# Altium PCB TSE_power_control_board.PcbDoc
Units mm, origin at the board's own origin, x right, y up, seen from the top; angles counter-clockwise.
Board outline 87.5 x 79 mm, 2 copper layers (Top Layer, Bottom Layer); 60 components, 32 nets, 169 pads, 50 vias.
Unrouted connection lines stored in the file: 1.
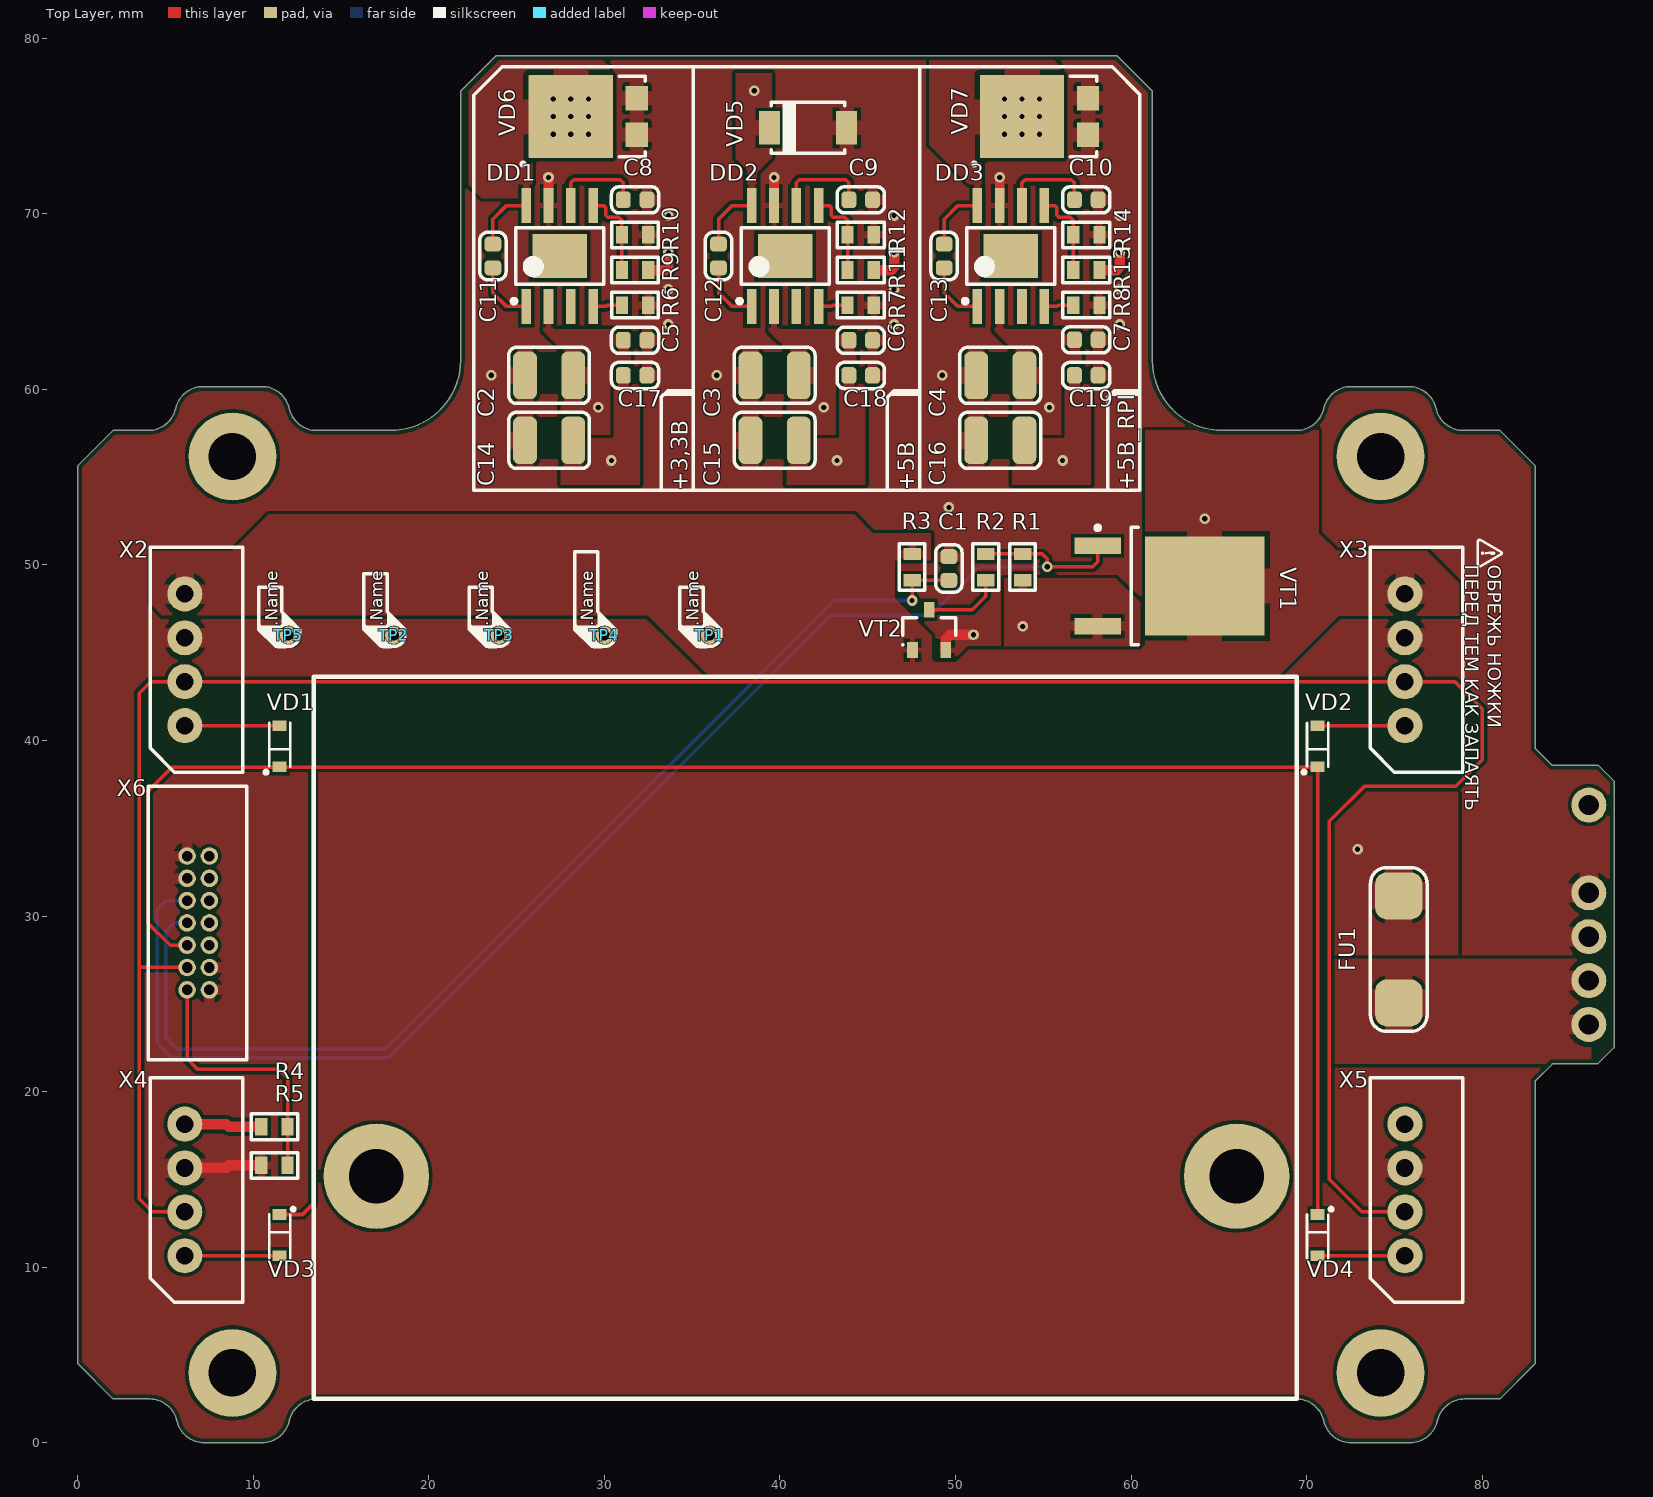
[diagram p0: Top Layer view]
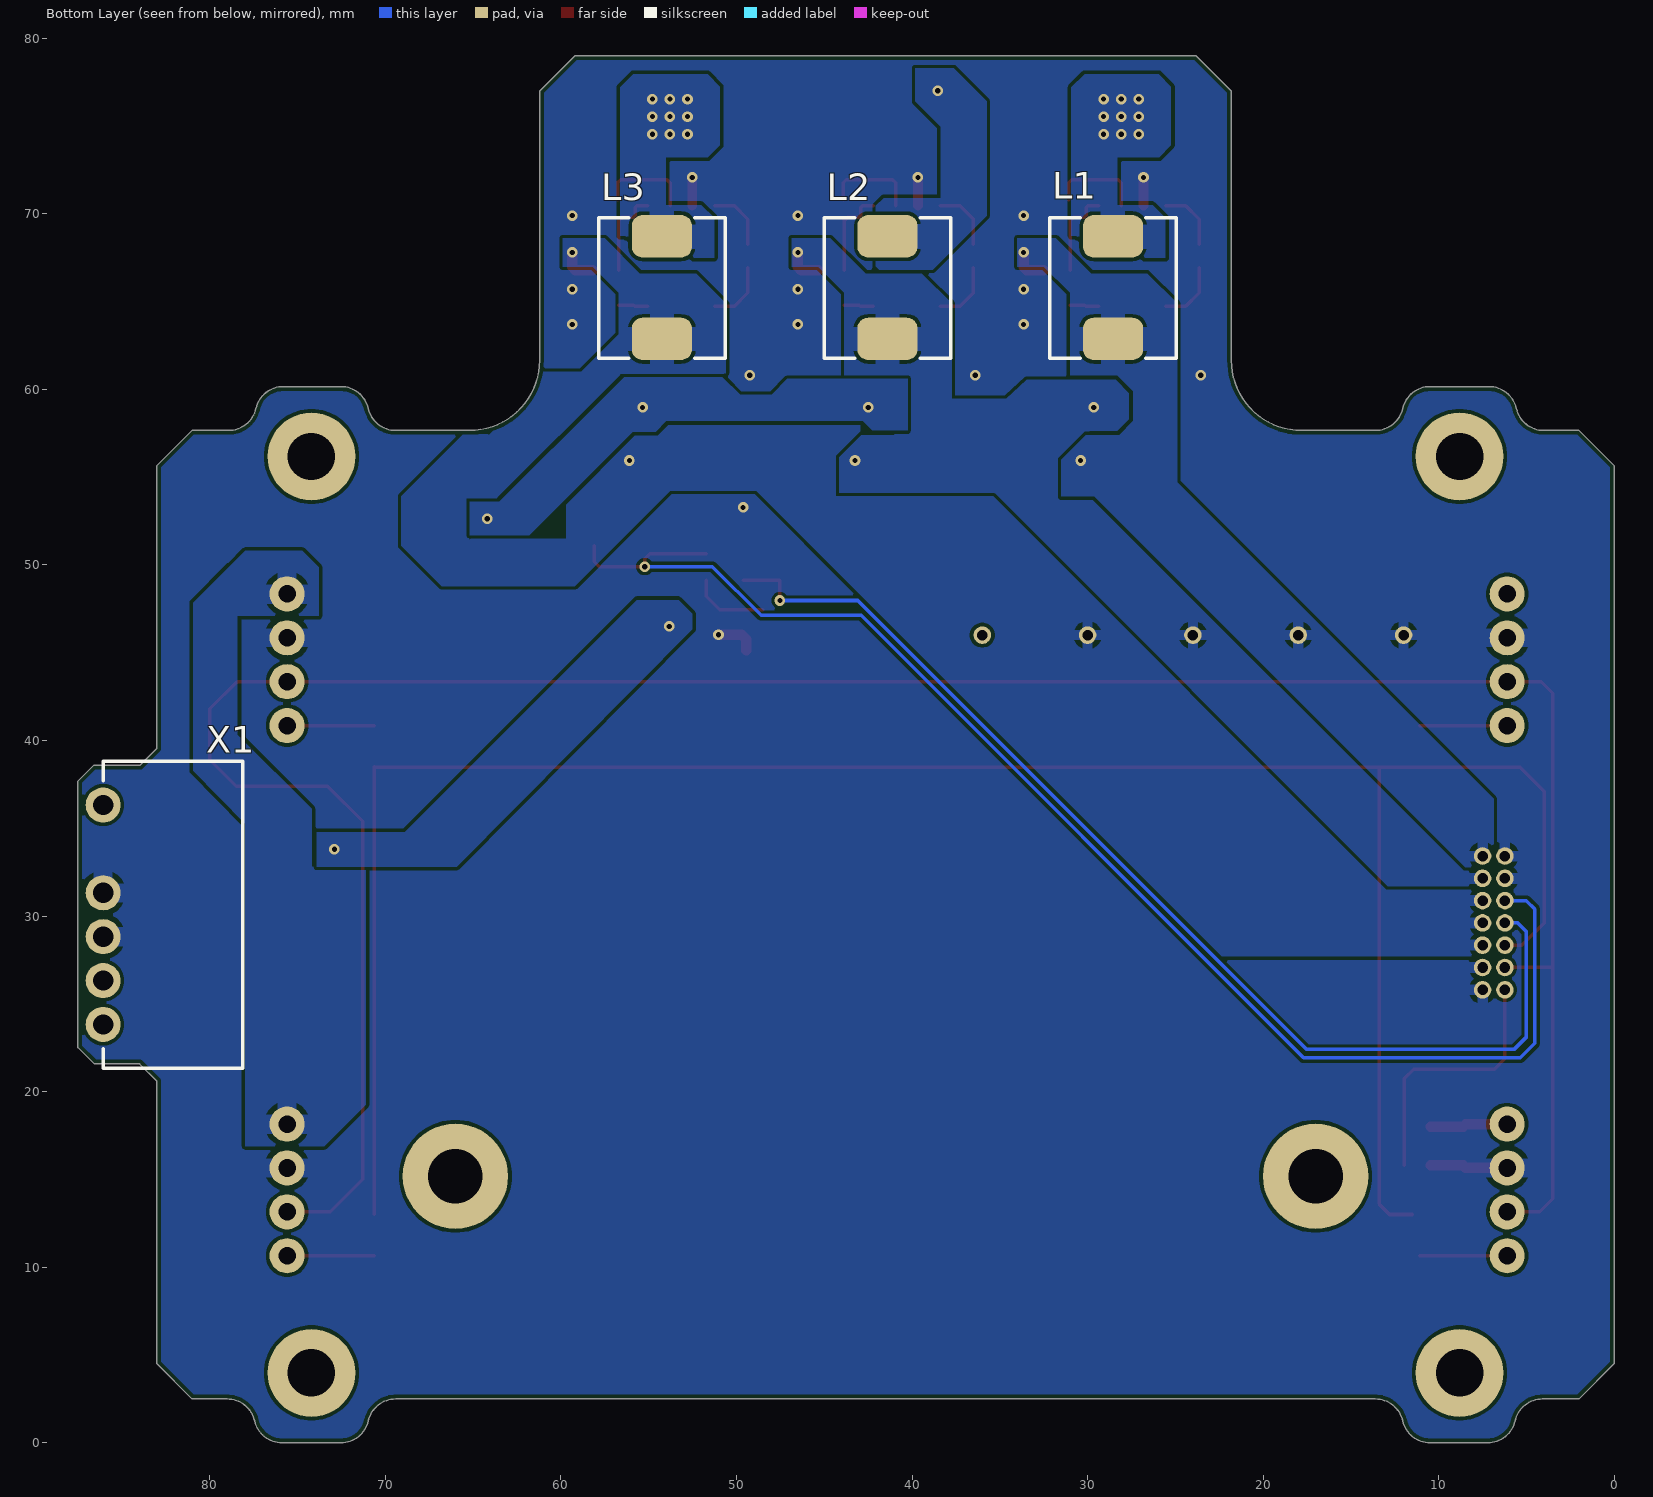
[diagram p1: Bottom Layer view, seen from below]
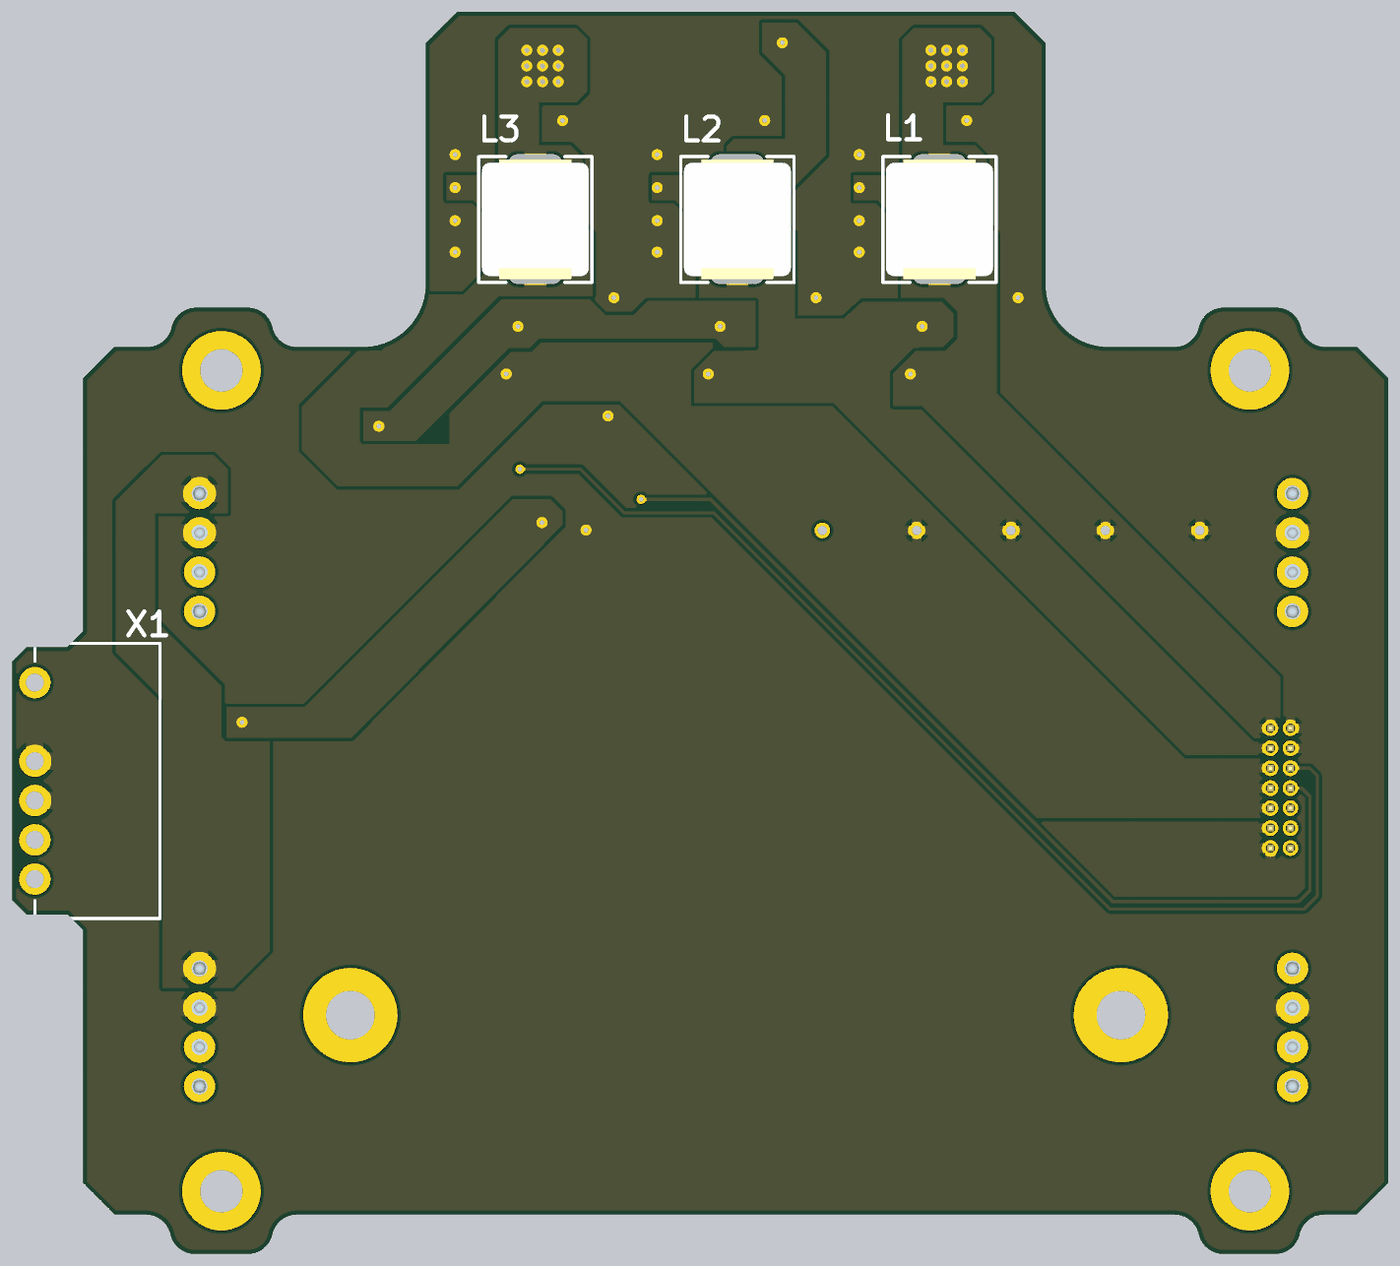
[diagram p2: 3D render of the assembled board from below, using the file's embedded part models]

## Layer stack, top to bottom
Top Solder: solder mask 0.0102, Solder Resist, Dk 3.5
Top Layer: signal copper 0.0356
Dielectric 1: dielectric 0.32, FR-4, Dk 4.8
Bottom Layer: signal copper 0.0356
Bottom Solder: solder mask 0.0102, Solder Resist, Dk 3.5

## Board outline
2.012,2.494 4.09,2.494 cw(c4.09,0.894) 5.651,1.244 ccw(c7.212,1.594) 7.212,-0.006 10.49,-0.006 ccw(c10.49,1.594) 12.051,1.244 cw(c13.612,0.894) 13.612,2.494 69.412,2.494 cw(c69.412,0.894) 70.974,1.244 ccw(c72.535,1.594) 72.535,-0.006 75.89,-0.006 ccw(c75.89,1.594) 77.451,1.244 cw(c79.012,0.894) 79.012,2.494 81.012,2.494 83.012,4.494 83.012,20.587 84.003,21.578 86.578,21.578 87.512,22.512 87.512,37.688 86.622,38.578 83.997,38.578 83.012,39.563 83.012,55.662 81.012,57.662 78.935,57.662 cw(c78.935,59.262) 77.374,58.912 ccw(c75.812,58.562) 75.812,60.162 72.535,60.162 ccw(c72.535,58.562) 70.974,58.912 cw(c69.412,59.262) 69.412,57.662 65.212,57.662 cw(c65.212,61.662) 61.212,61.662 61.212,76.994 59.212,78.994 23.812,78.994 21.812,76.994 21.812,61.662 cw(c17.812,61.662) 17.812,57.662 13.612,57.662 cw(c13.612,59.262) 12.051,58.912 ccw(c10.49,58.562) 10.49,60.162 7.135,60.162 ccw(c7.135,58.562) 5.574,58.912 cw(c4.012,59.262) 4.012,57.662 2.012,57.662 0.012,55.662 0.012,4.494

## Design rules (kind name [scope] priority, off if disabled: settings)
AcuteAngle min_acute_angle [OnCopper] p1: minimum=3.50000000000000E+0001 checktracksonly=FALSE // Минимальный угол между примитивами топологии
BoardOutlineClearance board_outline_clearance_std [NOT (OnLayer('Bottom Overlay') OR OnLayer('Top Overlay'))] p1: gap=0.25 ignorepadtopadclearanceinfootprint=FALSE except(0: Arc-SplitContinuation Track-SplitContinuation SMDPad-SplitContinuation THPad-SplitContinuation Via-SplitContinuation Fill-SplitContinuation Poly-SplitContinuation Region-SplitContinuation Text-SplitContinuation) // Отступ элементов топологии от края фрезеруемой печатной платы
Clearance clearance_outer_35um_std [OnTopLayer OR OnBottomLayer] p1: gap=0.2 ignorepadtopadclearanceinfootprint=TRUE except(0.25: Arc-Hole Track-Hole SMDPad-Hole THPad-Hole Via-Hole Fill-Hole Poly-Hole Region-Hole Text-Hole) // Зазоры на внешних слоях
Clearance clearance_inner_35um_std [NOT (OnTopLayer Or OnBottomLayer)] p2: gap=0.2 ignorepadtopadclearanceinfootprint=FALSE except(0.25: Arc-Hole Track-Hole SMDPad-Hole THPad-Hole Via-Hole Fill-Hole Poly-Hole Region-Hole Text-Hole) // Зазоры на внутренних слоях
ComponentClearance [All] p1: gap=0 collisioncheckmode=3 verticalgap=0 showdistances=FALSE
DiffPairsRouting diff_pairs_routing [All] p1: maxlimit=0.127 minlimit=0.127 mostfreqgap=0.127 toplayer_minwidth=0.143 toplayer_maxwidth=0.143 toplayer_prefwidth=0.143 bottomlayer_minwidth=0.143 bottomlayer_maxwidth=0.143 bottomlayer_prefwidth=0.143 impedanceprofiledriven=TRUE impedanceprofileid={FD46899E-B5A2-4EF5-A302-5D2DB6A51F35} maxuncoupledlength=12.7 // Правила трассировки дифференциальных пар
HoleSize min_hole_size_std [IsPad] p1: absolutevalues=TRUE maxlimit=5.9 minlimit=0.6 maxpercent=80.000 minpercent=20.000 // Диаметр межслойного переходного отверстия
HoleSize min_hole_size_via_std [IsVia] p2: absolutevalues=TRUE maxlimit=5.9 minlimit=0.3 maxpercent=80.000 minpercent=20.000 // Минимальный диаметр монтажного отверстия
HoleToHoleClearance hole_to_hole_clearance_std [All] p1: gap=0.2 allowstackedmicrovias=FALSE // Минимальное расстояние между краями двух отверстий
MinimumAnnularRing min_via_ar_std [All] p1: minimumring=0.15 // Поясок площадки переходного отверстия (Annular ring VIA)
MinimumAnnularRing min_pad_ar_std [All] p2: minimumring=0.2 // Поясок монтажной контактной площадки (Annular ring PAD)
MinimumSolderMaskSliver min_solder_mask_bridge_std [All] p1: minsoldermaskwidth=0.15 // Мнимальная ширина масочного мостика
PlaneClearance plane_clearance_35um_std [All] p1: clearance=0.2 // Отступ полигона (для слоя plane) от элементов топологии
PlaneConnect [All] p1: planeconnectstyle=Relief reliefexpansion=0.5 reliefentries=4 reliefconductorwidth=0.2 reliefairgap=0.2
PolygonConnect poly_connect_to_pad<=0.3 [(AsMM(PadXSize_AllLayers)<=0.301) or (AsMM(PadYSize_AllLayers)<=0.301)] p1: thpad.connectstyle=Relief thpad.reliefconductorwidth=0.2 thpad.reliefentries=4 thpad.polygonreliefangle="90 Angle" thpad.airgapwidth=0.2 smdpad.connectstyle=Relief smdpad.reliefconductorwidth=0.2 smdpad.reliefentries=4 smdpad.polygonreliefangle="90 Angle" smdpad.airgapwidth=0.2 via.connectstyle=Direct via.reliefconductorwidth=0.254 via.reliefentries=4 via.polygonreliefangle="90 Angle" via.airgapwidth=0.254 // Правила подключения полигонов для падов от 0,3мм и меньше
PolygonConnect poly_connect_to_pad<=0.4 [(AsMM(PadXSize_AllLayers)<=0.401) or (AsMM(PadYSize_AllLayers)<=0.401)] p2: thpad.connectstyle=Relief thpad.reliefconductorwidth=0.26 thpad.reliefentries=4 thpad.polygonreliefangle="90 Angle" thpad.airgapwidth=0.2 smdpad.connectstyle=Relief smdpad.reliefconductorwidth=0.26 smdpad.reliefentries=4 smdpad.polygonreliefangle="90 Angle" smdpad.airgapwidth=0.2 via.connectstyle=Direct via.reliefconductorwidth=0.254 via.reliefentries=4 via.polygonreliefangle="90 Angle" via.airgapwidth=0.254 // Правила подключения полигонов для падов от 0,4 и меньше
PolygonConnect poly_connect_to_pad<=0.6 [(AsMM(PadXSize_AllLayers)<=0.601) or (AsMM(PadYSize_AllLayers)<=0.601)] p3: thpad.connectstyle=Relief thpad.reliefconductorwidth=0.33 thpad.reliefentries=4 thpad.polygonreliefangle="90 Angle" thpad.airgapwidth=0.2 smdpad.connectstyle=Relief smdpad.reliefconductorwidth=0.33 smdpad.reliefentries=4 smdpad.polygonreliefangle="90 Angle" smdpad.airgapwidth=0.2 via.connectstyle=Direct via.reliefconductorwidth=0.254 via.reliefentries=4 via.polygonreliefangle="90 Angle" via.airgapwidth=0.254 // Правила подключения полигонов для падов от 0,6мм и меньше
PolygonConnect poly_connect_to_pad<=0.7 [(AsMM(PadXSize_AllLayers)<=0.701) or (AsMM(PadYSize_AllLayers)<=0.701)] p4: thpad.connectstyle=Relief thpad.reliefconductorwidth=0.46 thpad.reliefentries=4 thpad.polygonreliefangle="90 Angle" thpad.airgapwidth=0.2 smdpad.connectstyle=Relief smdpad.reliefconductorwidth=0.46 smdpad.reliefentries=4 smdpad.polygonreliefangle="90 Angle" smdpad.airgapwidth=0.2 via.connectstyle=Direct via.reliefconductorwidth=0.254 via.reliefentries=4 via.polygonreliefangle="90 Angle" via.airgapwidth=0.254 // Правила подключения полигонов для падов от 0,7мм и меньше
PolygonConnect poly_connect_to_pad<=0.8 [(AsMM(PadXSize_AllLayers)<=0.8)or(AsMM(PadYSize_AllLayers)<=0.8)] p5: thpad.connectstyle=Relief thpad.reliefconductorwidth=0.53 thpad.reliefentries=4 thpad.polygonreliefangle="90 Angle" thpad.airgapwidth=0.3 smdpad.connectstyle=Relief smdpad.reliefconductorwidth=0.53 smdpad.reliefentries=4 smdpad.polygonreliefangle="90 Angle" smdpad.airgapwidth=0.2 via.connectstyle=Direct via.reliefconductorwidth=0.254 via.reliefentries=4 via.polygonreliefangle="90 Angle" via.airgapwidth=0.254 // Правила подключения полигонов для падов от 0,8мм и меньше
PolygonConnect poly_connect_to_pad<=1 [(AsMM(PadXSize_AllLayers)<=1.01)or(AsMM(PadYSize_AllLayers)<=1.01)] p6: thpad.connectstyle=Relief thpad.reliefconductorwidth=0.6 thpad.reliefentries=4 thpad.polygonreliefangle="90 Angle" thpad.airgapwidth=0.3 smdpad.connectstyle=Relief smdpad.reliefconductorwidth=0.6 smdpad.reliefentries=4 smdpad.polygonreliefangle="90 Angle" smdpad.airgapwidth=0.2 via.connectstyle=Direct via.reliefconductorwidth=0.254 via.reliefentries=4 via.polygonreliefangle="90 Angle" via.airgapwidth=0.254 // Правила подключения полигонов для падов от 1мм и меньше
PolygonConnect poly_connect_to_pad<=1.3 [(AsMM(PadXSize_AllLayers)<=1.31)or(AsMM(PadYSize_AllLayers)<=1.31)] p7: thpad.connectstyle=Relief thpad.reliefconductorwidth=0.66 thpad.reliefentries=4 thpad.polygonreliefangle="90 Angle" thpad.airgapwidth=0.3 smdpad.connectstyle=Relief smdpad.reliefconductorwidth=0.86 smdpad.reliefentries=4 smdpad.polygonreliefangle="90 Angle" smdpad.airgapwidth=0.2 via.connectstyle=Direct via.reliefconductorwidth=0.254 via.reliefentries=4 via.polygonreliefangle="90 Angle" via.airgapwidth=0.254 // Правила подключения полигонов для падов от 1,3мм и меньше
PolygonConnect poly_connect_to_pad<=1.6 [(AsMM(PadXSize_AllLayers)<=1.61)or(AsMM(PadYSize_AllLayers)<=1.61)] p8: thpad.connectstyle=Relief thpad.reliefconductorwidth=0.8 thpad.reliefentries=4 thpad.polygonreliefangle="90 Angle" thpad.airgapwidth=0.3 smdpad.connectstyle=Relief smdpad.reliefconductorwidth=1 smdpad.reliefentries=4 smdpad.polygonreliefangle="90 Angle" smdpad.airgapwidth=0.2 via.connectstyle=Direct via.reliefconductorwidth=0.254 via.reliefentries=4 via.polygonreliefangle="90 Angle" via.airgapwidth=0.254 // Правила подключения полигонов для падов от 1,6мм и меньше
PolygonConnect poly_connect_to_pad<=1.8 [(AsMM(PadXSize_AllLayers)<=1.8)or(AsMM(PadYSize_AllLayers)<=1.8)] p9: thpad.connectstyle=Relief thpad.reliefconductorwidth=1 thpad.reliefentries=4 thpad.polygonreliefangle="90 Angle" thpad.airgapwidth=0.3 smdpad.connectstyle=Relief smdpad.reliefconductorwidth=1.2 smdpad.reliefentries=4 smdpad.polygonreliefangle="90 Angle" smdpad.airgapwidth=0.2 via.connectstyle=Direct via.reliefconductorwidth=0.254 via.reliefentries=4 via.polygonreliefangle="90 Angle" via.airgapwidth=0.254 // Правила подключения полигонов для падов от 1,8мм и меньше
PolygonConnect poly_connect_to_pad<=2 [(AsMM(PadXSize_AllLayers)<=2.01)or(AsMM(PadYSize_AllLayers)<=2.01)] p10: thpad.connectstyle=Relief thpad.reliefconductorwidth=1.1 thpad.reliefentries=4 thpad.polygonreliefangle="90 Angle" thpad.airgapwidth=0.3 smdpad.connectstyle=Relief smdpad.reliefconductorwidth=1.4 smdpad.reliefentries=4 smdpad.polygonreliefangle="90 Angle" smdpad.airgapwidth=0.2 via.connectstyle=Direct via.reliefconductorwidth=0.254 via.reliefentries=4 via.polygonreliefangle="90 Angle" via.airgapwidth=0.254 // Правила подключения полигонов для падов от 2мм и меньше
PolygonConnect poly_connect_to_pad<=2.3 [(AsMM(PadXSize_AllLayers)<=2.31)or(AsMM(PadYSize_AllLayers)<=2.31)] p11: thpad.connectstyle=Relief thpad.reliefconductorwidth=1.2 thpad.reliefentries=4 thpad.polygonreliefangle="90 Angle" thpad.airgapwidth=0.3 smdpad.connectstyle=Relief smdpad.reliefconductorwidth=1.4 smdpad.reliefentries=4 smdpad.polygonreliefangle="90 Angle" smdpad.airgapwidth=0.2 via.connectstyle=Direct via.reliefconductorwidth=0.254 via.reliefentries=4 via.polygonreliefangle="90 Angle" via.airgapwidth=0.254 // Правила подключения полигонов для падов от 2,3мм и меньше
PolygonConnect poly_connect_to_pad<=2.5 [(AsMM(PadXSize_AllLayers)<=2.51)or(AsMM(PadYSize_AllLayers)<=2.51)] p12: thpad.connectstyle=Relief thpad.reliefconductorwidth=1.2 thpad.reliefentries=4 thpad.polygonreliefangle="90 Angle" thpad.airgapwidth=0.3 smdpad.connectstyle=Relief smdpad.reliefconductorwidth=1.4 smdpad.reliefentries=4 smdpad.polygonreliefangle="90 Angle" smdpad.airgapwidth=0.2 via.connectstyle=Direct via.reliefconductorwidth=0.254 via.reliefentries=4 via.polygonreliefangle="90 Angle" via.airgapwidth=0.254 // Правила подключения полигонов для падов от 2,5мм и меньше
PolygonConnect poly_connect_to_pad<=2.7 [(AsMM(PadXSize_AllLayers)<=2.71)or(AsMM(PadYSize_AllLayers)<=2.71)] p13: thpad.connectstyle=Relief thpad.reliefconductorwidth=1.4 thpad.reliefentries=4 thpad.polygonreliefangle="90 Angle" thpad.airgapwidth=0.3 smdpad.connectstyle=Relief smdpad.reliefconductorwidth=1.6 smdpad.reliefentries=4 smdpad.polygonreliefangle="90 Angle" smdpad.airgapwidth=0.2 via.connectstyle=Direct via.reliefconductorwidth=0.254 via.reliefentries=4 via.polygonreliefangle="90 Angle" via.airgapwidth=0.254 // Правила подключения полигонов для падов от 2,7мм и меньше
PolygonConnect poly_connect_to_pad<=3 [(AsMM(PadXSize_AllLayers)<=3.01)or(AsMM(PadYSize_AllLayers)<=3.01)] p14: thpad.connectstyle=Relief thpad.reliefconductorwidth=1.6 thpad.reliefentries=4 thpad.polygonreliefangle="90 Angle" thpad.airgapwidth=0.3 smdpad.connectstyle=Relief smdpad.reliefconductorwidth=1.8 smdpad.reliefentries=4 smdpad.polygonreliefangle="90 Angle" smdpad.airgapwidth=0.2 via.connectstyle=Direct via.reliefconductorwidth=0.254 via.reliefentries=4 via.polygonreliefangle="90 Angle" via.airgapwidth=0.254 // Правила подключения полигонов для падов от 3мм и меньше
PolygonConnect poly_connect_to_pad<=7 [(AsMM(PadXSize_AllLayers)<7.01)or(AsMM(PadYSize_AllLayers)<=7.01)] p15: thpad.connectstyle=Relief thpad.reliefconductorwidth=2 thpad.reliefentries=4 thpad.polygonreliefangle="90 Angle" thpad.airgapwidth=0.4 smdpad.connectstyle=Relief smdpad.reliefconductorwidth=2 smdpad.reliefentries=4 smdpad.polygonreliefangle="90 Angle" smdpad.airgapwidth=0.3 via.connectstyle=Direct via.reliefconductorwidth=0.254 via.reliefentries=4 via.polygonreliefangle="90 Angle" via.airgapwidth=0.254 // Правила подключения полигонов для падов от 7мм и меньше
PolygonConnect poly_connect_to_pad [All] p16: thpad.connectstyle=Relief thpad.reliefconductorwidth=0.25 thpad.reliefentries=4 thpad.polygonreliefangle="90 Angle" thpad.airgapwidth=0.2 smdpad.connectstyle=Relief smdpad.reliefconductorwidth=0.25 smdpad.reliefentries=4 smdpad.polygonreliefangle="90 Angle" smdpad.airgapwidth=0.2 via.connectstyle=Direct via.reliefconductorwidth=0.25 via.reliefentries=4 via.polygonreliefangle="90 Angle" via.airgapwidth=0.2 // Правила подключения полигонов общие
RoutingCorners [All] p1 off: cornerstyle=45-Degree minsetback=2.5 maxsetback=2.5
RoutingVias [All] p1: holewidth=0.3 width=0.6 viastyle="Through Hole" minholewidth=0.3 minwidth=0.6 maxholewidth=5.9 maxwidth=6.4
SilkToSilkClearance silk_to_silk_clearance_std [All] p1 off: silktosilkclearance=0.15 // Отступ текста шелкографии от других примитивов шелкографии
SilkToSolderMaskClearance silk_to_solder_mask_clearance_std [IsPad] p1 off: minsilkscreentomaskgap=0.15 clearancetoexposedcopper=FALSE // Минимальное расстояние между элементами шелкографии и вскрытой медью
SolderMaskExpansion solder_mask_expansion_std [All] p1: expansion=0.05 istentingtop=FALSE // Припуск паяльной масски
UnRoutedNet [All] p1: checkbadconnections=TRUE
Width width_35um_std [All] p1: maxlimit=10 minlimit=0.2 preferedwidth=0.2 checkconnectedcopper=TRUE // Ширина проводников (общая)
19 further rules are at their usual default settings.

## Classes and differential pairs
component class TSE_power_control_board_main: C1 FU1 R1 R2 R3 R4 R5 TP4 VD1 VD2 VD3 VD4 VT1 VT2 X1 X2 X3 X4 X5 X6
component class TSE_power_control_board_converters: C2 C3 C4 C5 C6 C7 C8 C9 C10 C11 C12 C13 C14 C15 C16 C17 C18 C19 DD1 DD2 DD3 L1 L2 L3 R6 R7 R8 R9 R10 R11 R12 R13 R14 TP4 TP5 VD5 VD6 VD7

## Components (designator, comment, footprint, x,y, rotation, side; value= is the part's Value field where it differs from the comment)
C1 "0,1мк" C0603 49.625,49.8 r270 top
C2 "10мк" C1210 26.85,60.8 r0 top
C3 "10мк" C1210 39.7,60.8 r0 top
C4 "10мк" C1210 52.55,60.8 r0 top
C5 "0,1мк" C0603 31.75,62.8 r180 top
C6 "0,1мк" C0603 44.6,62.8 r180 top
C7 "0,1мк" C0603 57.45,62.825 r180 top
C8 "0,022мк" C0603 31.75,70.8 r180 top
C9 "0,022мк" C0603 44.6,70.8 r180 top
C10 "0,022мк" C0603 57.45,70.8 r180 top
C11 "0,1мк" C0603 23.65,67.6 r270 top
C12 "0,1мк" C0603 36.5,67.6 r270 top
C13 "0,1мк" C0603 49.35,67.6 r270 top
C14 "100мк" C1210 26.85,57.1 r0 top
C15 "100мк" C1210 39.7,57.1 r0 top
C16 "100мк" C1210 52.55,57.1 r0 top
C17 "0,1мк" C0603 31.75,60.8 r180 top
C18 "0,1мк" C0603 44.6,60.8 r180 top
C19 "0,1мк" C0603 57.45,60.8 r180 top
DD1 "LMR14050" SO-8PP 27.45,67.6 r90 top
DD2 "LMR14050" SO-8PP 40.3,67.6 r90 top
DD3 "LMR14050" SO-8PP 53.15,67.6 r90 top
FU1 "15А" FU2410 75.25,28.098 r90 top
L1 "3,3мк" 2525 28.55,65.8 r270 bottom
L2 "4,7мк" 2525 41.4,65.8 r270 bottom
L3 "2,2мк" 2525 54.25,65.8 r270 bottom
R1 "47к" R0603 53.825,49.875 r90 top
R2 "10к" R0603 51.725,49.875 r90 top
R3 "510к" R0603 47.525,49.875 r90 top
R4 "10к" R0603 11.2,18 r180 top
R5 "2,4к" R0603 11.2,15.8 r0 top
R6 "23,7к" R0603 31.75,64.8 r180 top
R7 "23,7к" R0603 44.6,64.8 r180 top
R8 "23,7к" R0603 57.45,64.8 r180 top
R9 "100к" R0603 31.75,66.8 r0 top
R10 "29,4к" R0603 31.75,68.8 r180 top
R11 "100к" R0603 44.6,66.8 r0 top
R12 "17.8к" R0603 44.6,68.8 r180 top
R13 "100к" R0603 57.45,66.8 r0 top
R14 "17.8к" R0603 57.45,68.8 r180 top
TP1 "+4S" TP_0,6X1 36,46 r90 top
TP2 "+3,3В" TP_0,6X1 18,46 r90 top
TP3 "+5В" TP_0,6X1 24,46 r90 top
TP4 "+5В_RPI" TP_0,6X1 30,46 r90 top
TP5 "GND" TP_0,6X1 12,46 r90 top
VD1 "1N5817WS" SOD323 11.5,40.1 r90 top
VD2 "1N5817WS" SOD323 70.625,40.1 r90 top
VD3 "1N5817WS" SOD323 11.5,11.4 r270 top
VD4 "1N5817WS" SOD323 70.625,11.4 r270 top
VD5 "PMEG3050BEP" SOD128 41.6,74.9 r0 top
VD6 "SS10PH10-M3" TO-277A 29.09,75.54 r180 top
VD7 "SS10PH10-M3" TO-277A 54.79,75.54 r180 top
VT1 "IRFR5305TRPBF" D-PAK 62.2,48.8 r0 top
VT2 "IRLML6344TRPbF" SOT23-3 48.5,46.3 r90 top
X1 "Blade 4+1pin" "BLADE 4+1P M" 86.075,30.075 r270 bottom
X2 "Molex-99990988" Molex-99990988 6.1,44.6 r90 top
X3 "Molex-99990988" Molex-99990988 75.6,44.6 r90 top
X4 "Molex-99990988" Molex-99990988 6.1,14.4 r90 top
X5 "Molex-99990988" Molex-99990988 75.6,14.4 r90 top
X6 "IDC_14" IDC1.27_14 6.865,29.61 r270 top

## Footprints (in the part's own frame and the unit in brackets; to place one, negate y for a bottom-side part, rotate by r counter-clockwise, add the part's x,y. Pads: shape width x height; smd on the part's side, far side on the other; paste and mask are expansions set on the pad)
2525 [mil] "Корпус: SMD 6.86*6.47*3.0"
  rrect50% 95x135 smd: 1(-115,0) 2(115,0)
  silkscreen extent -156,-142 158,142, body extent -149,-134 150,134, height 127
"BLADE 4+1P M" [mm] "Ножевой разъём - 4+1 конт. угловая вилка на плату с шагом 2.50мм"
  round 2 hole 1.15: 1(6.25,0) 2(3.75,0) 3(1.25,0) 4(-1.25,0) 5(-6.25,0)
  silkscreen extent -8.75,0 8.75,7.95
C0603 [mm] "Chip Capacitor, 2-Leads, Body 1,60x0,80mm, IPC Medium Density"
  rrect50% 0.85x0.95 smd: 1(-0.675,0) 2(0.675,0)
  Top Layer pour cut-out: -0.254,0.5 -0.254,-0.5 0.254,-0.5 0.254,0.5
  silkscreen extent -1.35,-0.75 1.35,0.75, body extent -0.85,-0.45 0.85,0.45, height 0.9
C1210 [mm] "Chip Capacitor, 2-Leads, Body 3,20x2,50mm, IPC Medium Density"
  rrect50% 1.35x2.7 smd: 1(-1.375,0) 2(1.375,0)
  Top Layer pour cut-out: -0.6,1.325 -0.6,-1.05 0.6,-1.05 0.6,1.325
  silkscreen extent -2.3,-1.6 2.3,1.6, body extent -1.7,-1.35 1.7,1.35, height 2.7
D-PAK [mm] "D-PAK, 3-Pads, Body 6,21x6,73mm (max), IPC High Density"
  rect 2.65x0.95 smd: 1(-4.1,2.29) 3(-4.1,-2.29)
  rect 6.8x5.65 smd: 2(2,0)
  silkscreen extent -4.22,-3.35 -1.8,3.44, body extent -4.7,-3.25 4.8,3.25, height 2.3
FU2410 [mm]
  rrect50% 2.69x2.69 smd: 1(-3.048,0) 2(3.048,0)
  silkscreen extent -4.67,-1.62 4.67,1.62, body extent -3.05,-1.27 3.05,1.27, height 2.58
IDC1.27_14 [mm] "Разъем - 14 конт. прямая вилка на плату с шагом 1.27мм"
  round 1 hole 0.6: 1(-3.81,0.635) 2(-2.54,0.635) 3(-1.27,0.635) 4(0,0.635) 5(1.27,0.635) 6(2.54,0.635) 7(3.81,0.635) 8(-3.81,-0.635) 9(-2.54,-0.635) 10(-1.27,-0.635) 11(0,-0.635) 12(1.27,-0.635) 13(2.54,-0.635) 14(3.81,-0.635)
  silkscreen extent -7.8,-2.85 7.8,2.75, body extent -7.59,-2.65 7.59,2.55, height 5.4
Molex-99990988 [mm] "Разъем - 4 конт. прямая вилка на плату с шагом 2.50мм"
  round 2 hole 1: 1(-3.75,0) 2(-1.25,0) 3(1.25,0) 4(3.75,0)
  silkscreen extent -6.4,-3.3 6.4,1.97, body extent -6.2,-3.1 6.2,1.8, height 5.8
R0603 [mm]
  rect 0.7x1 smd: 1(-0.75,0) 2(0.75,0)
  silkscreen extent -1.33,-0.73 1.33,0.73, body extent -0.8,-0.43 0.8,0.43, height 0.45
SO-8PP [mm] "SOIC, 8-Leads, Body 4,90x3,90mm, Pitch 1,27mm, IPC High Density"
  rect 2x0.55 smd: 1(-2.875,1.905) 2(-2.875,0.635) 3(-2.875,-0.635) 4(-2.875,-1.905) 5(2.875,-1.905) 6(2.875,-0.635) 7(2.875,0.635) 8(2.875,1.905)
  rect 2.49x3.1 smd: 9(0,0)
  silkscreen extent -2.7,-2.5 1.6,2.72, body extent -3.1,-2.5 3.1,2.5, height 1.75
SOD128 [mm]
  rect 1.2x1.9 smd: 1(-2.2,0) 2(2.2,0)
  silkscreen extent -2.11,-1.46 2.09,1.46, body extent -2.5,-1.35 2.5,1.35, height 1.1
SOD323 [mm]
  rect 0.6x0.8 smd: 1(-1.6,0) 2(0.75,0)
  silkscreen extent -2,-0.6 0.9,0.87, body extent -1.68,-0.68 0.82,0.67, height 1
SOT23-3 [mm] "SOT23, 3-Leads, Body 2,90x2,30mm, Pitch 0,95mm, IPC Medium Density"
  rect 0.9x0.6 smd: 1(-1.15,0.95) 2(-1.15,-0.95) 3(1.15,0)
  silkscreen extent -0.9,-1.5 0.7,1.55, body extent -1.35,-1.5 1.15,1.5, height 1.05
TO-277A [mm] "SMPC (TO-277A)"
  rrect1% 1.27x1.4 smd: 1(-2.76,1.04) 2(-2.76,-1.04)
  rrect1% 4.8x4.72 smd: 3(1,0)
  silkscreen extent -3.25,-2.3 3.73,2.7, body extent -3.25,-2.3 3.25,2.3, height 1.2
TP_0,6X1 [mm]
  round 1 hole 0.6: 1(0,0)

## Part data
C1 C11 C12 C13: library part CC0603JPX7R9BB104, "Конденсатор кер. 0,1мкФ 50В", Manufacturer=Yageo, Name=CC0603JPX7R9BB104, TKE=X7R
C2 C3 C4: library part CL32A106KATLNNE, "Конденсатор кер. 10мкФ 35В", Manufacturer=Yageo, Voltage=35В, Name=CC1206KKX7R8BB106, TKE=X7R
C5 C6 C7 C17 C18 C19: library part CC0603JPX7R9BB104, "Конденсатор кер. 0,1мкФ 50В", Manufacturer=Yageo, Voltage=50В, Name=CC0603JPX7R9BB104, TKE=X7R
C8 C9 C10: library part CC0603JRX7R9BB223, "Конденсатор кер. 0,022мкФ 50В", Manufacturer=Yageo, Voltage=50В, Name=CC0603JRX7R9BB223, TKE=X7R
C14 C15 C16: library part CL32A107MPVNNNE, "Конденсатор кер. 100мкФ 10В", Manufacturer=EPCOS, Voltage=10В, ESR=0,6Ом, Name=B41858C6107
DD1 DD2 DD3: "Понижающий DC/DC преобразователь Uвх=40В, Iвых=5А", Manufacturer="Texas Instruments", Name=LMR14050
FU1: library part fuse, "Предохранитель SMD"
L1: library part IHLP2525CZER3R3M01, "Катушка индуктивности 3,3мкГн 6А", I saturation=3,2, R=0,050
L2: library part IHLP2525CZER4R7M01, "Катушка индуктивности 4,7мкГн 5,5А", I saturation=3,2, R=0,050
L3: library part IHLP2525CZER2R2M01, "Катушка индуктивности 2,2мкГн 8А", I saturation=3,2, R=0,050
R1: library part RC0603FR-0747KL, "Резистор 47кОм 0,063Вт 1%", Manufacturer=YAGEO, Tolerance=1%, Name=RC0603FR-0747KL
R2 R4: library part RC0603FR-0710KL, "Резистор 10кОм 0,063Вт 1%", Manufacturer=YAGEO, Tolerance=1%, Name=RC0603FR-0710KL
R3: library part RC0603FR-07510KL, "Резистор 510кОм 0,1Вт 1%", Manufacturer=YAGEO, Tolerance=1%, Name=RC0603FR-07510KL
R5: library part RC0603FR-072K4L, "Резистор 2,4 кОм 0,1Вт 1%"
R6 R7 R8: library part RC0603FR-0723K7L, "Резистор 23,7 кОм 0,1Вт 1%"
R9 R11 R13: library part RC0603FR-07100KL, "Резистор 100кОм 0,1Вт 1%", Manufacturer=YAGEO, Tolerance=1%, Name=RC0603FR-07100KL
R10: library part RC0603FR-0729K4L, "Резистор 29,4 кОм 0,1Вт 1%"
R12 R14: library part RC0603FR-0717K8L, "Резистор 17,8 кОм 0,1Вт 1%"
TP1 TP2 TP3 TP4 TP5: library part TESTPOINT_HOLE
  TP1: Name=+4S
  TP2: Name=+3,3В
  TP3: Name=+5В
  TP4: Name=+5В_RPI
  TP5: Name=GND
VD1 VD2 VD3 VD4: "Диод Шоттки 1N5817WS 20V 1А 0.45V", current=1A, drop voltage=0,45В, Voltage=20В, Name=1N5817WS, Производитель="Hottech Co. Ltd"
VD5: "Диод Шоттки 30В 5А", Manufacturer=NXP, Name=PMEG3050BEP
VD6 VD7: "Диод Шоттки 100В 10А", Manufacturer=Vishay, Name=SS10PH10-M3
VT1: "Транзистор полевой P-канальный -55В -31А 110Вт 0,065Ом", Name=IRFR5305TRPBF
VT2: "N-MOSFET 30В 5А", Наименование=IRLML6344TRPbF
X1: library part "Blade 4+1P M", "Ножевой разъём - 4 конт. прямая вилка на плату с шагом 2.54мм", Contact_1=PACK+, Contact_2=PACK+, Contact_3=PACK-, Contact_4=PACK-, Contact_5=Contact_5, Наименование="Blade 4+1pin"
X2 X3 X4 X5: "Разъем - 4 конт. прямая вилка на плату, шаг 2,50 мм", Contact_1=Contact_1, Contact_2=Contact_2, Contact_3=Contact_3, Contact_4=Contact_4, Наименование=Molex-99990988
X6: "Разъем - 14 конт. прямая вилка на плату", Contact_1=Contact_1, Contact_2=Contact_2, Contact_3=Contact_3, Contact_4=Contact_4, Contact_5=Contact_5, Contact_6=Contact_6, Contact_7=Contact_7, Contact_8=Contact_8, Contact_9=Contact_9, Contact_10=Contact_10, Contact_11=Contact_11, Contact_12=Contact_12, Contact_13=Contact_13, Contact_14=Contact_14, Наименование=IDC_14

## Free pads (board coordinates)
  round 5 hole 2.7: 4(8.812,56.178) 4(74.212,56.178) 5(8.812,3.978) 6(74.212,3.978)
  round 6 hole 3.1 paste-2539.97: 7(17.012,15.178) 7(66.012,15.178)

## Via types
v1: diameter 0.6, hole 0.3, Top Layer to Bottom Layer, 50 vias

## Nets (pads, with @x,y where several pads share a name; then routed paths per layer and width w, separated by ;. In a path a pad name is that pad's centre, name@x,y a point inside that pad or via, vN(x,y) a via of type N, cw(c..) or ccw(c..) an arc to the next point about the centre after c; other vN are vias at no path point)
+3,3В: C14.2 C17.2 L1.2 R9.2 TP2.1 X6.1 | length 2
  Top Layer w0.6: R9.2 33.474,66.8 33.65,66.976 v1(33.65,67.8)
  other v1: 30.4,55.95
+4S: C3.2 C4.2 C6.2 C7.2 DD2.2 DD3.2 R3.2 R4.2 TP1.1 VT1.2 VT2.1 X2.4 X3.4 X4.4 X5.4 | length 4.4
  Top Layer w0.6: X4.4 8.45,18.15 8.6,18 R4.2
  other v1: 64.2,52.625 42.5,58.975 55.35,58.975
+5В: C2.2 C5.2 C15.2 C18.2 DD1.2 L2.2 R11.2 TP3.1 X6.2 | length 2
  Top Layer w0.6: R11.2 46.324,66.8 46.5,66.976 v1(46.5,67.8)
  other v1: 43.25,55.95 29.65,58.975
+5В_RPI: C16.2 C19.2 L3.2 R13.2 TP4.1 X6.3 X6.4 X6.5 | length 2
  Top Layer w0.6: R13.2 59.174,66.8 59.35,66.976 v1(59.35,67.8)
  other v1: 56.1,55.95
GND: C1.1 C2.1 C3.1 C4.1 C5.1 C6.1 C7.1 C8.1 C9.1 C10.1 C14.1 C15.1 C16.1 C17.1 C18.1 C19.1 DD1.7 DD2.7 DD3.7 R5.1 R6.1 R7.1 R8.1 R10.1 R12.1 R14.1 TP5.1 VD5.2 VD6.1 VD6.2 VD7.1 VD7.2 VT2.2 X1.3 X1.4 X2.3 X3.3 X4.3 X5.3 X6.6 X6.7 X6.8 X6.9 | length 11.5
  Top Layer w0.55: DD1.7 v1(26.815,72.072) ; DD2.7 v1(39.665,72.072) ; DD3.7 v1(52.515,72.072)
  Top Layer w0.6: X4.3 8.45,15.65 8.6,15.8 R5.1 ; VT2.2@49.453,45.153 49.453,45.765 49.713,46.025 v1(51.025,46.025)
  other v1: 49.625,53.275 23.55,60.8 36.4,60.8 49.25,60.8 33.65,63.7 46.5,63.7 59.35,63.7 33.65,65.7 46.5,65.7 59.35,65.7 33.65,69.9 46.5,69.9 59.35,69.9
NetC1_2: C1.2 R3.1 X6.11 | length 64.1
  Top Layer w0.2: v1(47.525,47.975) R3.1 C1.2
  Bottom Layer w0.2: X6.11 5.51,29.61 5,29.1 5,23.11 5.71,22.4 17.525,22.4 43.1,47.975 v1(47.525,47.975)
NetC8_2: C8.2 DD1.6 | length 5.4
  Top Layer w0.2: DD1.6 28.085,71.77 28.261,71.946 30.899,71.946 31.075,71.77 C8.2
NetC9_2: C9.2 DD2.6 | length 5.4
  Top Layer w0.2: DD2.6 40.935,71.77 41.111,71.946 43.749,71.946 43.925,71.77 C9.2
NetC10_2: C10.2 DD3.6 | length 5.4
  Top Layer w0.2: DD3.6 53.785,71.77 53.961,71.946 56.599,71.946 56.775,71.77 C10.2
NetC11_1: C11.1 DD1.8 L1.1 VD6.3 | length 3.6
  Top Layer w0.2: C11.1 23.65,69.7 24.425,70.475 DD1.8
  other v1: 27.09,74.54 28.09,74.54 29.09,74.54 27.09,75.54 28.09,75.54 29.09,75.54 27.09,76.54 28.09,76.54 29.09,76.54
NetC11_2: C11.2 DD1.1 | length 3.6
  Top Layer w0.2: C11.2 23.65,65.5 24.425,64.725 DD1.1
NetC12_1: C12.1 DD2.8 L2.1 VD5.1 | length 3.6
  Top Layer w0.2: C12.1 36.5,69.7 37.275,70.475 DD2.8
  other v1: 38.541,77.018
NetC12_2: C12.2 DD2.1 | length 3.6
  Top Layer w0.2: C12.2 36.5,65.5 37.275,64.725 DD2.1
NetC13_1: C13.1 DD3.8 L3.1 VD7.3 | length 3.6
  Top Layer w0.2: C13.1 49.35,69.7 50.125,70.475 DD3.8
  other v1: 52.79,74.54 53.79,74.54 54.79,74.54 52.79,75.54 53.79,75.54 54.79,75.54 52.79,76.54 53.79,76.54 54.79,76.54
NetC13_2: C13.2 DD3.1 | length 3.6
  Top Layer w0.2: C13.2 49.35,65.5 50.125,64.725 DD3.1
NetDD1_4: DD1.4 R6.2 | length 1.7
  Top Layer w0.2: DD1.4 30.075,64.725 30.15,64.8 R6.2
NetDD1_5: DD1.5 R9.1 R10.2 | length 5.1
  Top Layer w0.2: DD1.5 29.953,70.475 30.07,70.358 30.07,69.917 30.187,69.8 30.824,69.8 31,69.624 R10.2 R9.1
NetDD2_4: DD2.4 R7.2 | length 1.7
  Top Layer w0.2: DD2.4 42.925,64.725 43,64.8 R7.2
NetDD2_5: DD2.5 R11.1 R12.2 | length 5.1
  Top Layer w0.2: DD2.5 42.803,70.475 42.92,70.358 42.92,69.917 43.037,69.8 43.674,69.8 43.85,69.624 R12.2 R11.1
NetDD3_4: DD3.4 R8.2 | length 1.7
  Top Layer w0.2: DD3.4 55.775,64.725 55.85,64.8 R8.2
NetDD3_5: DD3.5 R13.1 R14.2 | length 5.1
  Top Layer w0.2: DD3.5 55.653,70.475 55.77,70.358 55.77,69.917 55.887,69.8 56.524,69.8 56.7,69.624 R14.2 R13.1
NetFU1_1: FU1.1 X1.1 X1.2
NetFU1_2: FU1.2 R1.1 VT1.3
  other v1: 72.9,33.8 53.825,46.5
NetR1_2: R1.2 R2.2 VT1.1 X6.10 | length 80.1
  Top Layer w0.2: R2.2 R1.2 54.95,50.625 55.225,50.35 v1(55.225,49.9) 57.825,49.9 58.098,50.173 VT1.1@58.098,51.088
  Bottom Layer w0.2: X6.10 5.005,30.88 4.525,30.4 4.525,22.75 5.35,21.925 17.7,21.925 42.9,47.125 48.6,47.125 51.375,49.9 v1(55.225,49.9)
NetR2_1: R2.1 VT2.3 | length 4.4
  Top Layer w0.2: VT2.3 50.95,47.45 51.725,48.225 R2.1
NetR4_1: R4.1 R5.2 X6.14 | length 15
  Top Layer w0.2: X6.14@6.23,25.796 6.23,21.87 6.825,21.275 11.425,21.275 11.955,20.745 R4.1@11.955,18.005 ; R5.2@11.955,15.805 R4.1@11.955,17.995
NetVD1_1: VD1.1 VD2.1 VD3.1 VD4.1 X6.12 | length 130
  Top Layer w0.2: X6.12@6.22,28.34 5.26,28.34 4,29.6 4,37.1 5.39,38.49 VD1.1@11.49,38.49 ; VD3.1 12.8,13 13.4,13.6 13.4,38.49 ; VD1.1@11.51,38.49 13.4,38.49 ; VD2.1@70.615,38.49 13.4,38.49 ; VD4.1 VD2.1
NetVD1_2: VD1.2 X2.1 | length 5
  Top Layer w0.2: X2.1 11.075,40.85
NetVD2_2: VD2.2 X3.1 | length 5
  Top Layer w0.2: VD2.2 X3.1
NetVD3_2: VD3.2 X4.1 | length 5
  Top Layer w0.2: X4.1 11.075,10.65
NetVD4_2: VD4.2 X5.1 | length 5
  Top Layer w0.2: VD4.2 X5.1
NetX2_2: X2.2 X3.2 X4.2 X5.2 X6.13 | length 150.4
  Top Layer w0.2: X4.2 4.25,13.15 3.5,13.9 3.5,27.07 ; X6.13 3.5,27.07 ; X5.2 73.15,13.15 71.3,15 71.3,35.4 73.3,37.4 78.5,37.4 80,38.9 80,41.8 78.45,43.35 X3.2 X2.2 4.15,43.35 3.5,42.7 3.5,27.07
pads on no net: DD1.3 DD1.9 DD2.3 DD2.9 DD3.3 DD3.9 X1.5

## Polygon pours and split planes (outlines as drawn)
NetC11_1 on Top Layer "NONET_L-01_P-001" (solid, pour order 58): 30.475,78.175 29.65,79 24.275,79 22.275,77 22.275,71.65 23.025,70.9 25.275,70.9 25.275,69.475 25.9,69.475 25.9,73.2 30.475,73.2
+5В on Top Layer "+5В_L01_P032" (solid, pour order 32): 44.85,60.85 44.301,61.399 43.376,61.399 43.376,57.289 43.313,57.225 40.375,57.225 40.375,54.575 44.85,54.575
+4S on Top Layer "NONET_L-01_P-001" (solid, pour order 35): 43.3,59.263 43.313,59.25 43.313,57.225 40.375,57.225 40.375,62.325 39.375,63.325 39.375,64.731 39.95,64.731 39.95,63.419 44.35,63.419 44.35,61.3 43.3,61.3
+5В_RPI on Top Layer "+5В_RPI_L01_P046" (solid, pour order 46): 57.7,60.85 57.151,61.399 56.226,61.399 56.226,57.289 56.163,57.225 53.225,57.225 53.225,54.575 57.7,54.575
+4S on Top Layer "NONET_L-01_P-001" (solid, pour order 47): 56.15,59.262 56.163,59.25 56.163,57.225 53.225,57.225 53.225,62.325 52.225,63.325 52.225,64.731 52.8,64.731 52.8,63.419 57.2,63.419 57.2,61.3 56.15,61.3
+3,3В on Top Layer "+3,3В_L01_P048" (solid, pour order 48): 32,60.85 31.451,61.399 30.526,61.399 30.526,57.289 30.462,57.225 27.525,57.225 27.525,54.575 32,54.575
+5В on Top Layer "NONET_L-01_P-001" (solid, pour order 49): 30.45,59.262 30.462,59.25 30.462,57.225 27.525,57.225 27.525,62.325 26.525,63.325 26.525,64.731 27.1,64.731 27.1,63.419 31.5,63.419 31.5,61.3 30.45,61.3
NetC12_1 on Top Layer "NONET_L-01_P-001" (solid, pour order 59): 37.475,73.175 38.125,72.525 38.125,69.475 38.675,69.475 38.675,72.35 39.525,73.2 39.525,78 37.475,78
NetC13_1 on Top Layer "NONET_L-01_P-001" (solid, pour order 60): 51.5,73.2 53.837,73.2 56.175,73.2 56.175,78.175 55.35,79 48.5,79 48.5,73.925 50.975,71.45 50.975,69.475 51.5,69.475
GND on Top Layer "NONET_L-01_P-001" (solid, remove dead copper, pour order 62): 2.012,2.494 4.09,2.494 cw(c4.09,0.894) 5.651,1.244 ccw(c7.212,1.594) 7.212,-0.006 10.49,-0.006 ccw(c10.49,1.594) 12.051,1.244 cw(c13.612,0.894) 13.612,2.494 69.412,2.494 cw(c69.412,0.894) 70.974,1.244 ccw(c72.535,1.594) 72.535,-0.006 75.89,-0.006 ccw(c75.89,1.594) 77.451,1.244 cw(c79.012,0.894) 79.012,2.494 81.012,2.494 83.012,4.494 83.012,20.587 84.003,21.578 86.578,21.578 87.512,22.512 87.512,37.688 86.622,38.578 83.997,38.578 83.012,39.563 83.012,55.662 81.012,57.662 78.935,57.662 cw(c78.935,59.262) 77.374,58.912 ccw(c75.812,58.562) 75.812,60.162 72.535,60.162 ccw(c72.535,58.562) 70.974,58.912 cw(c69.412,59.262) 69.412,57.662 65.212,57.662 cw(c65.212,61.662) 61.212,61.662 61.212,76.994 59.212,78.994 23.812,78.994 21.812,76.994 21.812,61.662 cw(c17.812,61.662) 17.812,57.662 13.612,57.662 cw(c13.612,59.262) 12.051,58.912 ccw(c10.49,58.562) 10.49,60.162 7.135,60.162 ccw(c7.135,58.562) 5.574,58.912 cw(c4.012,59.262) 4.012,57.662 2.012,57.662 0.012,55.662 0.012,4.494
NetFU1_1 on Top Layer "NONET_L-01_P-001" (solid, pour order 21): 86.2,27.575 86.2,21.575 71.3,21.578 71.3,27.575 78.9,27.575
NetFU1_2 on Top Layer "NONET_L-01_P-001" (solid, pour order 40): 71.6,35.6 73.375,37.375 78.65,37.375 78.65,27.575 71.6,27.575
+4S on Top Layer "+4S_L01_P036" (solid, pour order 36): 35.952,43.675 68.407,43.675 71.832,47.1 78.7,47.1 78.7,48.95 76.85,50.8 71.715,50.8 70.7,51.815 70.7,57.662 60.8,57.662 60.8,45.45 60.525,45.175 50.75,45.175 50.021,44.446 48.854,44.446 48.65,44.65 48.65,45.975 46.525,48.1 46.525,50.275 48.6,50.275 48.6,51.8 45.3,51.8 44.225,52.875 10.875,52.875 8.8,50.8 4.175,50.8 4.175,47.75 4.825,47.1 4.85,47.125 32.455,47.125
NetFU1_2 on Top Layer "NONET_L-01_P-001" (solid, pour order 42): 59.131,49.25 60.525,47.875 60.525,45.175 52.775,45.175 52.775,49.25
NetC13_1 on Bottom Layer "NONET_L-01_P-001" (solid, pour order 0): 56.625,77.2 55.875,77.95 51.65,77.95 50.95,77.25 50.95,73.9 51.625,73.225 54.025,73.225 54.025,70.5 52,70.5 51.275,69.775 51.275,67.5 55.1,67.5 56.35,68.75 56.625,68.75
NetC11_1 on Bottom Layer "NONET_L-01_P-001" (solid, pour order 44): 30.925,77.2 30.175,77.95 25.95,77.95 25.25,77.25 25.25,73.9 25.925,73.225 28.325,73.225 28.325,70.5 26.3,70.5 25.575,69.775 25.575,67.5 29.4,67.5 30.65,68.75 30.925,68.75
NetC12_1 on Bottom Layer "NONET_L-01_P-001" (solid, pour order 51): 41.625,70.9 42.075,70.45 42.075,67.025 41.875,66.825 38.812,66.825 35.75,69.887 35.75,76.425 37.625,78.3 39.825,78.3 39.825,76.4 38.375,74.95 38.375,70.9
NetFU1_2 on Bottom Layer "NONET_L-01_P-001" (solid, pour order 52): 73.9,34.775 68.9,34.775 55.675,48 53.3,48 52.525,47.225 52.525,46.33 65.949,32.8 73.9,32.8
+4S on Bottom Layer "+4S_L02_P053" (solid, pour order 53): 71.124,19.251 71.124,32.8 74.2,32.8 74.2,36.1 78.425,40.325 78.425,47.1 73.8,47.1 73.8,49.875 74.725,50.8 77.975,50.8 78.825,49.95 78.85,49.95 80.95,47.85 80.95,38.275 77.975,35.263 77.975,16.9 73.475,16.9
+3,3В on Bottom Layer "+3,3В_L02_P054" (solid, pour order 54): 31.5,53.9 29.625,53.9 8.5,32.775 6.875,32.775 6.875,36.675 24.9,54.7 24.9,64.9 26.6,66.6 29.8,66.6 31.8,68.6 34,68.6 34,67 32.5,67 31,65.5 31,60.8 28.3,60.8 27.4,59.9 27.4,58.2 28.2,57.4 30.1,57.4 31.5,56
+4S on Bottom Layer "+4S_L02_P061" (solid, pour order 61): 40.25,57.662 42.262,57.662 42.8,58.2 54,58.2 54.6,57.6 55.9,57.6 61.8,51.7 65.2,51.7 65.2,53.6 63.5,53.6 57.4,59.7 56.4,60.7 50.8,60.7 49.8,59.7 48,59.7 47.1,60.6 40.25,60.6
+5В_RPI on Bottom Layer "+5В_RPI_L02_P063" (solid, pour order 63): 56.5,51.5 53.779,54.221 48.871,54.221 22.35,27.7 6.85,27.7 6.85,31.5 6.875,31.525 6.9,31.5 12.975,31.5 35.375,53.9 44.35,53.9 44.35,56.225 42.95,57.625 42.95,57.945 53.894,57.945 54.482,57.358 55.782,57.358 59.7,53.44 59.7,51.5 65.145,51.5 65.2,51.445 65.4,51.645 65.4,53.8 63.66,53.8 56.7,60.76 56.58,60.88 50.6,60.88 50.6,64.9 52.3,66.6 55.5,66.6 57.5,68.6 59.9,68.6 59.9,67 58.2,67 56.7,65.5 56.7,63.13 58.83,61 61.2,61 61.2,60.2 62,59.4 62,58.8 62.4,58.8 63.3,57.9 63.7,57.9 63.7,57.8 64.1,57.4 64.15,57.45 65.55,57.45 69.1,53.9 69.1,51.1 66.8,48.8 59.2,48.8
+5В on Bottom Layer "+5В_L02_P064" (solid, pour order 64): 35.375,53.9 12.975,31.5 6.9,31.5 6.875,31.525 6.875,32.775 8.5,32.775 29.625,53.9 31.5,53.9 31.5,56 30.285,57.215 29.85,57.655 28.306,57.655 27.655,58.306 27.655,59.794 28.406,60.545 33.47,60.545 34.648,59.475 37.75,59.475 37.75,64.9 39.45,66.6 42.65,66.6 44.65,68.6 46.85,68.6 46.85,67 45.35,67 43.85,65.5 43.85,60.8 41.15,60.8 40.25,59.9 40.25,58.2 41.05,57.4 42.95,57.4 44.35,56 44.35,53.9
GND on Bottom Layer "NONET_L-01_P-001" (solid, remove dead copper, pour order 66): 2.012,2.494 4.09,2.494 cw(c4.09,0.894) 5.651,1.244 ccw(c7.212,1.594) 7.212,-0.006 10.49,-0.006 ccw(c10.49,1.594) 12.051,1.244 cw(c13.612,0.894) 13.612,2.494 69.412,2.494 cw(c69.412,0.894) 70.974,1.244 ccw(c72.535,1.594) 72.535,-0.006 75.89,-0.006 ccw(c75.89,1.594) 77.451,1.244 cw(c79.012,0.894) 79.012,2.494 81.012,2.494 83.012,4.494 83.012,20.587 84.003,21.578 86.578,21.578 87.512,22.512 87.512,37.688 86.622,38.578 83.997,38.578 83.012,39.563 83.012,55.662 81.012,57.662 78.935,57.662 cw(c78.935,59.262) 77.374,58.912 ccw(c75.812,58.562) 75.812,60.162 72.535,60.162 ccw(c72.535,58.562) 70.974,58.912 cw(c69.412,59.262) 69.412,57.662 65.212,57.662 cw(c65.212,61.662) 61.212,61.662 61.212,76.994 59.212,78.994 23.812,78.994 21.812,76.994 21.812,61.662 cw(c17.812,61.662) 17.812,57.662 13.612,57.662 cw(c13.612,59.262) 12.051,58.912 ccw(c10.49,58.562) 10.49,60.162 7.135,60.162 ccw(c7.135,58.562) 5.574,58.912 cw(c4.012,59.262) 4.012,57.662 2.012,57.662 0.012,55.662 0.012,4.494

## Silkscreen, mask and mechanical layers (free items; w line width, h text height)
Top Overlay:
  drawing of 81 lines, arcs and shapes, not listed
  text "+3,3В" at 35.063,54.238 h1.6 r90
  text "+5В" at 47.962,54.238 h1.6 r90
  text "+5В_RPI" at 60.5,54.25 h1.6 r90
  text "ОБРЕЖЬ НОЖКИ / ПЕРЕД ТЕМ КАК ЗАПАЯТЬ" at 78.766,50 h1.3 r270
Mechanical 1:
  lines w0.5: 83.012,4.494 81.012,2.494 79.012,2.494 ccw(c79.012,0.894) 77.451,1.244 cw(c75.89,1.594) 75.89,-0.006 72.535,-0.006 cw(c72.535,1.594) 70.974,1.244 ccw(c69.412,0.894) 69.412,2.494 13.612,2.494 ccw(c13.612,0.894) 12.051,1.244 cw(c10.49,1.594) 10.49,-0.006 7.212,-0.006 cw(c7.212,1.594) 5.651,1.244 ccw(c4.09,0.894) 4.09,2.494 2.012,2.494 0.012,4.494 0.012,55.662 2.012,57.662 4.012,57.662 ccw(c4.012,59.262) 5.574,58.912 cw(c7.135,58.562) 7.135,60.162 10.49,60.162 cw(c10.49,58.562) 12.051,58.912 ccw(c13.612,59.262) 13.612,57.662 17.812,57.662 ccw(c17.812,61.662) 21.812,61.662 21.812,76.994 23.812,78.994 59.212,78.994 61.212,76.994 61.212,61.662 ccw(c65.212,61.662) 65.212,57.662 69.412,57.662 ccw(c69.412,59.262) 70.974,58.912 cw(c72.535,58.562) 72.535,60.162 75.812,60.162 cw(c75.812,58.562) 77.374,58.912 ccw(c78.935,59.262) 78.935,57.662 81.012,57.662 83.012,55.662 83.012,39.563 83.997,38.578 86.622,38.578 87.512,37.688 87.512,22.512 86.578,21.578 84.003,21.578 83.012,20.587 83.012,4.494